# Altium PCB DEVEFX000001A.PcbDoc (part 3 of 3)
Units mm, origin at the board's own origin, x right, y up, seen from the top; angles counter-clockwise.
Board outline 90 x 103.5 mm, 6 copper layers (Top Layer, IN1, IN2, IN3, IN4, Bottom Layer), stack 1.072 mm thick; 156 components, 261 nets, 794 pads, 332 vias.
Unrouted connection lines stored in the file: 137.
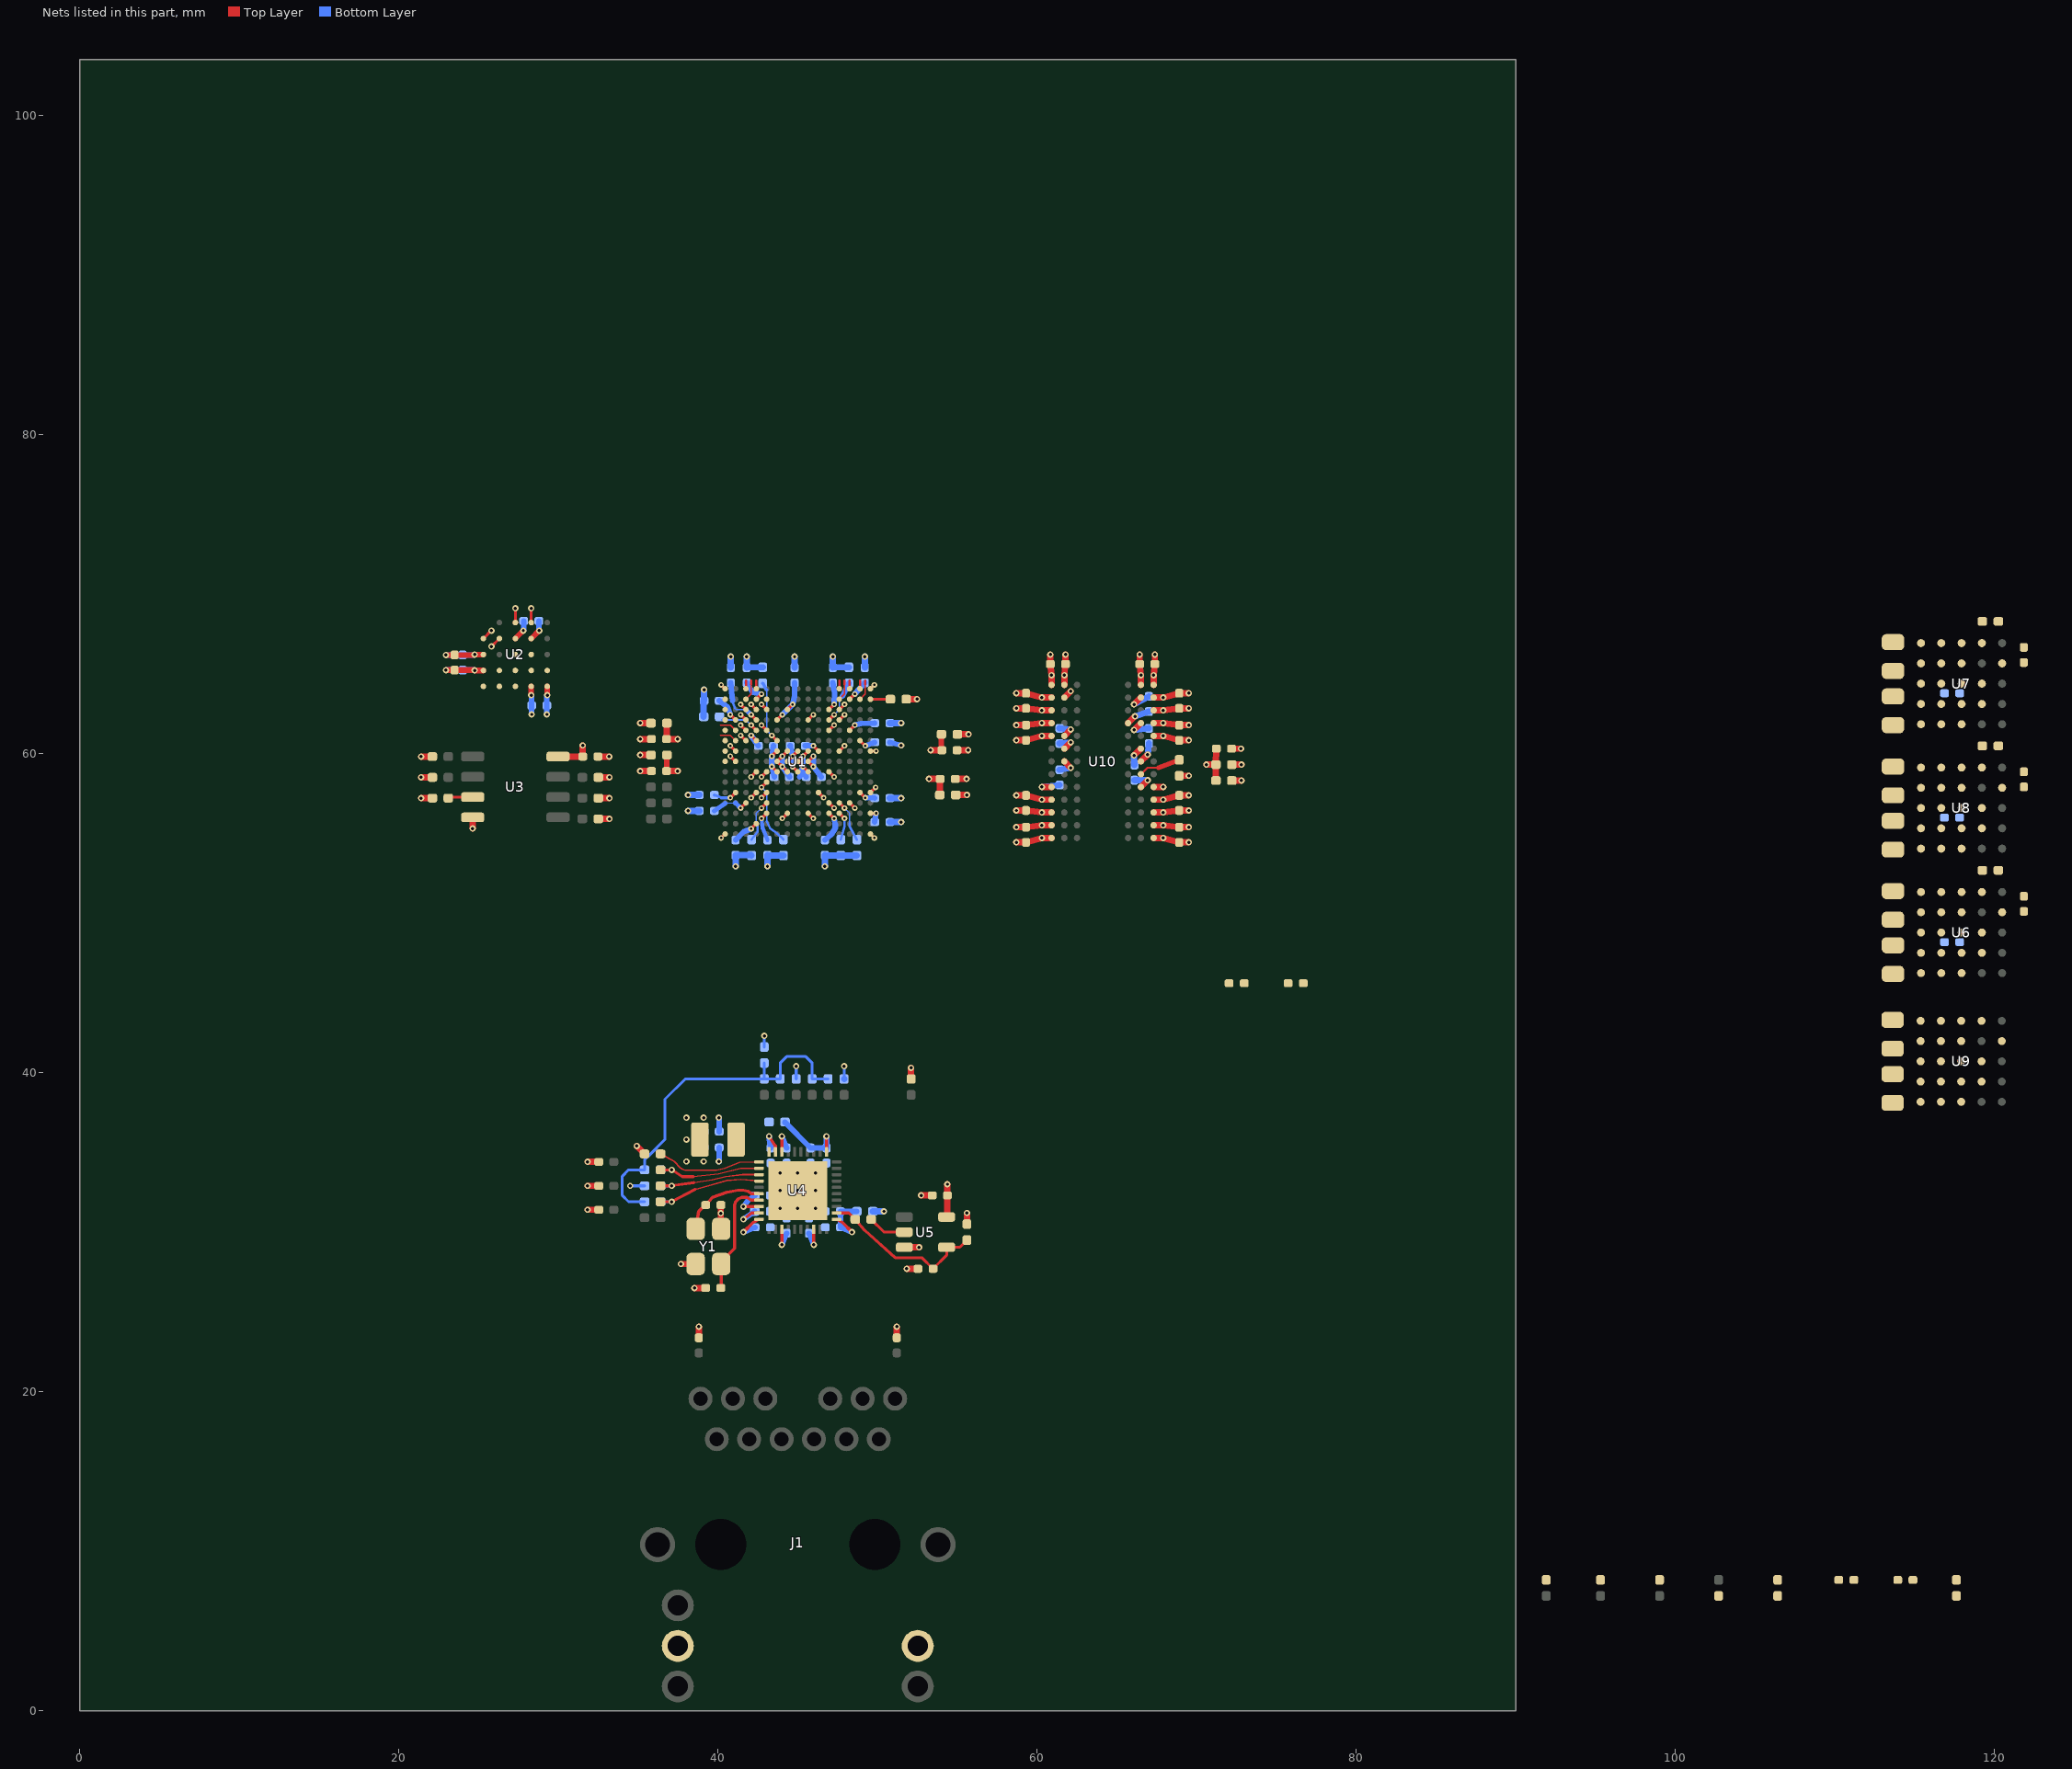
[diagram p7: the nets of this part, all layers, seen from the top]

## Via types
v1: diameter 0.4, hole 0.2, Top Layer to Bottom Layer, tented both sides, 159 vias
v2: diameter 0.35/0.15/0.35 (per signal layer), hole 0.15, Top Layer to Bottom Layer, tented both sides, 91 vias
v3: diameter 0.35, hole 0.15, Top Layer to Bottom Layer, tented both sides, 46 vias
v4: diameter 0.4/0.2/0.4 (per signal layer), hole 0.2, Top Layer to Bottom Layer, tented both sides, 27 vias
v5: diameter 0.5, hole 0.2, Top Layer to Bottom Layer, 9 vias

## Nets (pads, with @x,y where several pads share a name; then routed paths per layer and width w, separated by ;. In a path a pad name is that pad's centre, name@x,y a point inside that pad or via, vN(x,y) a via of type N, cw(c..) or ccw(c..) an arc to the next point about the centre after c; other vN are vias at no path point) (continued)
GND: C1.1 C2.1 C3.1 C4.1 C5.1 C6.1 C7.1 C8.1 C9.1 C10.1 C11.1 C12.1 C13.1 C14.1 C15.1 C16.1 C17.1 C18.1 C19.1 C20.1 C21.1 C22.1 C23.1 C24.1 C25.1 C26.1 C27.1 C28.1 C29.1 C30.1 C31.1 C32.1 C33.1 C34.1 C35.1 C36.1 C37.1 C38.1 C39.1 C40.1 C41.1 C42.1 C43.1 C44.1 C45.1 C46.1 C47.1 C48.1 C49.1 C50.1 C51.1 C52.1 C53.1 C54.1 C55.1 C56.1 C57.1 C58.1 C59.1 C60.1 C61.1 C62.1 C63.1 C64.1 C65.1 C66.1 C67.1 C68.1 C69.1 C70.1 C71.1 C72.1 C73.1 C74.1 C75.1 C76.1 C77.1 C78.1 C79.1 C80.1 C81.1 C82.1 C83.1 J1.13 R1.2 R2.2 R3.2 R4.2 R5.2 R6.2 R7.2 R8.2 R24.1 R29.1 R31.1 R38.2 R43.2 R44.2 R45.2 R46.2 R53.1 R?.2 U1.A1 U1.A15 U1.D3 U1.G6 U1.G8 U1.H7 U1.H9 U1.J6 U1.J8 U1.M13 U1.R1 U1.R15 U2.B3 U2.C1 U2.E5 U3.4 U4.41 U5.3 U6.B3 U6.B4 U6.C3 U6.D3 U6.D4 U6.E3 U7.B3 U7.B4 U7.C3 U7.D3 U7.D4 U7.E3 U8.B3 U8.B4 U8.C3 U8.D3 U8.D4 U8.E3 U9.B3 U9.B4 U9.C3 U9.D3 U9.D4 U9.E3 U10.A1 U10.A8 U10.B1 U10.B2 U10.B8 U10.C9 U10.D1 U10.D8 U10.D9 U10.F2 U10.F8 U10.J1 U10.J9 U10.L1 U10.L9 U10.N1 U10.N9 Y1.2 Y1.4 | length 85.4
  Top Layer w0.2: v2(40.2,54.7) U1.R1@40.45,54.95 ; v2(40.2,64.3) U1.A1@40.45,64.05 ; v2(41.425,62.425) U1.D3@41.75,62.1 ; v2(43.375,59.175) U1.J6@43.7,58.85 ; v2(43.375,59.825) U1.G6@43.7,60.15 ; U1.J8@45,58.85 v2(44.675,59.175) U1.H7@44.35,59.5 v2(44.675,59.825) U1.G8@45,60.15 ; v2(45.975,59.175) U1.H9@45.65,59.5 v2(45.975,59.825) ; U1.M13@48.25,56.9 v2(48.575,56.575) ; U1.R15@49.55,54.95 v2(49.8,54.7) ; U1.A15@49.55,64.05 v2(49.8,64.3)
  Top Layer w0.35: v1(22.946,66.175) C21.1@23.5,66.175 24.721,66.175 v1(24.746,66.2) U2.C1@25.3,66.2 ; U2.B3@27.3,67.2 v1(27.8,67.7) ; v1(29.3,63.646) U2.E5@29.3,64.2 ; C42.1@40.175,31.7 v1(40.175,31.175) 40.175,30.225 Y1.2@40.2,30.2
  Top Layer w0.4: v1(24.625,55.295) U3.4@24.625,55.995 ; v1(31.825,31.4) C26.1@32.525,31.4 ; v1(31.825,32.9) C27.1@32.525,32.9 ; v1(31.825,34.4) C28.1@32.525,34.4 ; C20.1@32.475,59.8 v1(33.175,59.8) ; v1(35.125,58.9) C48.1@35.825,58.9 ; v1(35.125,60.9) C46.1@35.825,60.9 ; v1(37.675,28) Y1.4@38.375,28 ; v1(38.525,26.5) C41.1@39.225,26.5 ; C29.1@38.8,23.375 v1(38.8,24.075) ; C25.1@51.2,23.375 v1(51.2,24.075) ; U5.3@51.675,29.05 v1(52.6,29.05) ; R5.2@51.8,63.4 v1(52.475,63.4) ; v1(51.825,27.7) C39.1@52.525,27.7 ; v1(52.725,32.3) C40.1@53.425,32.3 ; C49.1@54.875,58.4 v1(55.575,58.4) ; C47.1@54.975,60.2 v4(55.675,60.2) ; v1(58.7,54.425) C75.1@59.3,54.425 v1(60.3,54.7) U10.N1@60.9,54.7 ; v1(58.7,56.425) C76.1@59.3,56.425 v1(60.3,56.3) U10.L1@60.9,56.3 ; v4(58.7,61.775) C83.1@59.3,61.775 v4(60.3,61.9) U10.D1@60.9,61.9 ; v1(58.7,63.775) C81.1@59.3,63.775 v1(60.3,63.5) U10.B1@60.9,63.5 ; v1(60.3,57.9) U10.J1@60.9,57.9 ; v1(60.825,66.2) C67.1@60.825,65.6 v1(60.9,64.9) U10.A1@60.9,64.3 ; U10.F2@61.7,60.3 v4(62.1,60.7) ; U10.B2@61.7,63.5 v1(62.1,63.9) ; v4(66.076,59.876) U10.F8@66.5,60.3 ; v4(66.076,61.476) U10.D8@66.5,61.9 ; v1(66.076,63.076) U10.B8@66.5,63.5 ; v1(66.425,66.2) C68.1@66.425,65.6 v1(66.5,64.9) U10.A8@66.5,64.3 ; U10.N9@67.3,54.7 v1(67.9,54.7) C77.1@68.9,54.425 v1(69.5,54.425) ; U10.L9@67.3,56.3 v1(67.9,56.3) C78.1@68.9,56.425 v1(69.5,56.425) ; U10.J9@67.3,57.9 v4(67.9,57.9) ; U10.D9@67.3,61.9 v1(67.9,61.9) C80.1@68.9,61.775 v1(69.5,61.775) ; U10.C9@67.3,62.7 v1(67.9,62.7) C79.1@68.9,62.825 v1(69.5,62.825) ; R?.2@68.9,58.6 v4(69.5,58.6) ; C66.1@72.175,60.3 v1(72.775,60.3) ; R53.1@72.2,59.3 v1(72.8,59.3)
  Bottom Layer w0.177: v1(34.5,32.9) R31.1@35.4,32.9 ; R29.1@44.9,39.6 v1(44.9,40.4) ; R24.1@47.9,39.6 v1(47.9,40.4)
  Bottom Layer w0.35: v1(22.946,66.175) C24.1@24,66.175 24.721,66.175 v1(24.746,66.2) ; v1(27.8,67.7) 27.825,67.725 C23.1@27.825,68.3 ; v1(29.275,62.446) C22.1@29.275,63 29.275,63.621 v1(29.3,63.646) ; v1(40.05,34.425) 40.075,34.425 C45.1@40.075,35.3 ; v1(40.05,37.175) 40.075,37.175 C33.1@40.075,36.3 ; C5.1@43.475,60.475 v2(43.375,59.825) v2(43.375,59.175) C3.1@43.525,58.525 ; C1.1@44.525,60.475 v2(44.675,59.825) v2(44.675,59.175) ; v2(45.975,59.825) v2(45.975,59.175) C4.1@46.475,58.525 ; C10.1@50.775,60.7 v4(51.475,60.5)
  Bottom Layer w0.4: v1(38.125,56.4) C18.1@38.825,56.4 ; v1(38.125,57.4) C19.1@38.825,57.4 ; R2.2@39.1,62.3 39.1,63.275 C16.1@39.125,63.3 v1(39.125,64) ; C15.1@40.8,65.375 v1(40.8,66.075) ; v1(41.1,52.925) C2.1@41.1,53.625 42.075,53.625 R8.2@42.1,53.6 ; v1(41.8,66.075) C17.1@41.8,65.375 41.825,65.4 R3.2@42.8,65.4 ; v1(43.1,52.925) C6.1@43.1,53.625 43.125,53.6 R1.2@44.1,53.6 ; C14.1@44.8,65.375 v1(44.8,66.075) ; v1(46.7,52.925) C7.1@46.7,53.625 46.725,53.6 R7.2@47.7,53.6 R6.2@48.7,53.6 ; v1(47.2,66.075) C13.1@47.2,65.375 47.225,65.4 R4.2@48.2,65.4 ; C12.1@49.2,65.375 v1(49.2,66.075) ; C9.1@50.775,55.7 v1(51.475,55.7) ; C8.1@50.775,57.2 v1(51.475,57.2) ; C11.1@50.775,61.9 v1(51.475,61.9) ; v1(60.3,57.9) C70.1@61.4,58.025 ; C71.1@61.4,60.625 v4(62.1,60.7) ; v4(66.076,59.876) C82.1@66.1,59.275 ; v4(66.076,61.476) C69.1@67,61.575 ; v1(66.076,63.076) C72.1@67,63.575
  other v5: 43.9,31.5 45,31.5 46.1,31.5 43.9,32.6 45,32.6 46.1,32.6 43.9,33.7 45,33.7 46.1,33.7
HYPERRAM_CK_C: U1.G2 U2.B1 | length 1.2
  Top Layer w0.177: U2.B1@25.3,67.2 v1(25.8,67.7)
  Top Layer w0.2: v2(40.775,60.475) U1.G2@41.1,60.15
HYPERRAM_CK_T: U1.H2 U2.B2 | length 1.2
  Top Layer w0.177: v1(25.8,66.7) U2.B2@26.3,67.2
  Top Layer w0.2: v2(40.775,59.825) U1.H2@41.1,59.5
HYPERRAM_CS_N: U1.E3 U2.A3 | length 1.4
  Top Layer w0.177: U2.A3@27.3,68.2 v1(27.3,69.1)
  Top Layer w0.2: v2(41.425,61.775) U1.E3@41.75,61.45
HYPERRAM_DQ0: U1.D1 U2.D3
HYPERRAM_DQ1: U1.H1 U2.D2
HYPERRAM_DQ2: U1.C1 U2.C4
HYPERRAM_DQ3: U1.E1 U2.D4
HYPERRAM_DQ4: U1.E2 U2.D5 | length 1.1
  Top Layer w0.089: 40.15,61.775 40.775,61.775 U1.E2@41.1,61.45
HYPERRAM_DQ5: U1.F2 U2.E3 | length 1.1
  Top Layer w0.089: 40.15,61.125 40.775,61.125 U1.F2@41.1,60.8
HYPERRAM_DQ6: U1.F1 U2.E2
HYPERRAM_DQ7: U1.G1 U2.E1
HYPERRAM_RWDS: U1.B1 U2.C3
IRQ_ETH_INTB_N: R42.2 U4.31 | length 6.6
  Top Layer w0.1: R42.2@36.4,34.9 37.275,34.425 37.65,34.025 ccw(c38.012,34.387) 38.012,33.875 39.896,33.875 40.425,34 41.35,34.375 U4.31@42.575,34.4
P0V75_DDR3_VREF: C66.2 C82.2 C83.2 R52.1 R53.2 U1.G15 U1.L15 U10.E1 U10.J8 | length 7.1
  Top Layer w0.2: U1.L15@49.55,57.55 v3(49.875,57.875) ; U1.G15@49.55,60.15 v3(49.904,60.15)
  Top Layer w0.4: v1(58.7,60.825) C83.2@59.3,60.825 v1(60.3,61.1) U10.E1@60.9,61.1 ; U10.J8@66.5,57.9 v1(66.924,58.324) ; v1(70.6,59.3) R53.2@71.2,59.3 ; R52.1@71.2,58.3 R53.2@71.2,59.3 ; C66.2@71.225,60.3 R53.2@71.2,59.3
  Bottom Layer w0.4: C82.2@66.1,58.325 v1(66.924,58.324)
P0V95: C3.2 C4.2 C11.2 C18.2 C55.2 FB3.1 FB4.1 FB5.1 FB6.1 U1.E13 U1.G7 U1.G9 U1.H6 U1.H8 U1.J7 U1.J9 U1.M3 U7.C1 U7.D1 U7.D2 U7.E1 U7.E2 | length 14
  Top Layer w0.2: v2(41.425,56.575) U1.M3@41.75,56.9 ; U1.J7@44.35,58.85 v2(44.025,59.175) U1.H6@43.7,59.5 v2(44.025,59.825) U1.G7@44.35,60.15 ; U1.J9@45.65,58.85 v2(45.325,59.175) U1.H8@45,59.5 v2(45.325,59.825) U1.G9@45.65,60.15 ; U1.E13@48.25,61.45 v2(48.575,61.775)
  Top Layer w0.4: v1(35.125,59.9) FB4.1@35.8,59.9 ; v1(35.125,61.9) FB6.1@35.8,61.9 ; FB3.1@54.9,57.4 v1(55.6,57.4) ; FB5.1@55,61.2 v4(55.7,61.2)
  Bottom Layer w0.1: 40.45,56.875 41.1,56.9
  Bottom Layer w0.3: C18.2@39.775,56.4 40.45,56.875 ; 41.1,56.9 v2(41.425,56.575)
  Bottom Layer w0.35: v2(44.025,59.825) v2(44.025,59.175) C3.2@44.475,58.525 ; 45.125,58.525 45.16,58.637 v2(45.325,59.175) ; v2(45.325,59.825) v2(45.325,59.175) ; C4.2@45.525,58.525 v2(45.325,59.175) ; v2(48.575,61.775) 48.95,61.875 C11.2@49.825,61.9
P0V95_FPGA_VCCA_BL: C48.2 FB4.2 U1.L5 | length 2.2
  Top Layer w0.2: v2(42.725,57.225) U1.L5@43.05,57.55
  Top Layer w0.35: C48.2@36.775,58.9 36.8,58.925 FB4.2@36.8,59.9
  Top Layer w0.4: C48.2@36.775,58.9 v1(37.475,58.9)
P0V95_FPGA_VCCA_BR: C49.2 FB3.2 U1.L10 | length 2.2
  Top Layer w0.2: U1.L10@46.3,57.55 v2(46.625,57.225)
  Top Layer w0.4: v1(53.225,58.4) C49.2@53.925,58.4 53.9,58.375 FB3.2@53.9,57.4
P0V95_FPGA_VCCA_TL: C46.2 FB6.2 U1.E5 | length 2.2
  Top Layer w0.2: v2(42.725,61.775) U1.E5@43.05,61.45
  Top Layer w0.4: C46.2@36.8,60.875 C46.2@36.775,60.9 ; FB6.2@36.8,61.9 36.8,60.925 C46.2@36.775,60.9 ; v1(37.475,60.9) C46.2@36.775,60.9
P0V95_FPGA_VCCA_TR: C1.2 C47.2 FB5.2 U1.G10 | length 2.7
  Top Layer w0.2: v2(45.975,60.475) U1.G10@46.3,60.15
  Top Layer w0.35: FB5.2@54,61.2 54,60.225 C47.2@54.025,60.2
  Top Layer w0.4: v4(53.325,60.2) C47.2@54.025,60.2
  Bottom Layer w0.35: C1.2@45.475,60.475 v2(45.975,60.475)
P1V0_ETH_AVDD: C34.2 C38.2 FB2.2 U4.21 | length 5
  Top Layer w0.2: U4.21@46.8,35.025 v1(46.8,36)
  Bottom Layer w0.35: FB2.2@44.2,36.9 44.2,36.875 C34.2@45.8,35.275 C38.2@46.8,35.275 v1(46.8,36)
P1V0_ETH_DVDD: C33.2 C35.2 C36.2 C37.2 C45.2 FB2.1 L1.2 U4.3 U4.8 U4.38 | length 5.5
  Top Layer w0.2: v1(41.6,31.6) U4.38@42.575,31.6 ; v1(44,29.2) U4.3@44,30.175 ; v1(46,29.2) U4.8@46,30.175
  Bottom Layer w0.35: v1(41.6,31.6) 41.9,32 C35.2@42.325,32.3 ; v1(44,29.2) C36.2@44.3,29.925 ; C37.2@45.7,29.925 v1(46,29.2)
  other v1: 38.025,34.425 39.1,34.425 38.025,35.8 38.025,37.175 39.1,37.175
P1V2_1V8_FPGA_VCCIO2A: C14.2 U1.C7 U1.D6 | length 3.2
  Top Layer w0.2: U1.D6@43.7,62.1 v2(44.025,62.425) ; U1.C7@44.35,62.75 v2(44.675,63.075)
  Bottom Layer w0.35: v2(44.025,62.425) v2(44.675,63.075) 44.8,63.6 C14.2@44.8,64.425
P1V2_1V8_FPGA_VCCIO2B: C13.2 U1.C11 U1.D9 | length 2.3
  Top Layer w0.2: U1.D9@45.65,62.1 v2(45.975,62.425) ; U1.C11@46.95,62.75 v2(47.275,63.075)
  Bottom Layer w0.35: C13.2@47.2,64.425 47.3,63.8 v2(47.275,63.075)
P1V2_1V8_FPGA_VCCIO4B: C6.2 U1.N5 U1.N7 | length 2.3
  Top Layer w0.2: v2(42.725,55.925) U1.N5@43.05,56.25 ; v2(44.025,55.925) U1.N7@44.35,56.25
  Bottom Layer w0.25: v2(42.725,55.925) 42.8,55.3 C6.2@43.1,54.575
P1V5: C8.2 C10.2 C63.2 C67.2 C68.2 C69.2 C70.2 C71.2 C72.2 C73.2 C74.2 C75.2 C76.2 C77.2 C78.2 C79.2 C80.2 C81.2 R52.2 U1.F14 U1.G12 U1.J11 U1.L14 U9.C1 U9.D1 U9.D2 U9.E1 U9.E2 U10.A2 U10.A9 U10.B9 U10.C1 U10.D7 U10.E2 U10.E9 U10.G2 U10.G8 U10.K1 U10.K9 U10.M1 U10.M9 | length 28.4
  Top Layer w0.2: U1.J11@46.95,58.85 v2(47.275,58.525) ; U1.G12@47.6,60.15 v2(47.925,60.475) ; U1.L14@48.9,57.55 v2(49.225,57.225) ; U1.F14@48.9,60.8 v2(49.225,60.475)
  Top Layer w0.4: v1(58.7,55.375) C75.2@59.3,55.375 v1(60.3,55.5) U10.M1@60.9,55.5 ; v1(58.7,57.375) C76.2@59.3,57.375 v1(60.3,57.1) U10.K1@60.9,57.1 ; v1(58.7,62.825) C81.2@59.3,62.825 v1(60.3,62.7) U10.C1@60.9,62.7 ; U10.G2@61.7,59.5 v1(62.1,59.1) ; U10.E2@61.7,61.1 v4(62.1,61.5) ; U10.A2@61.7,64.3 v1(61.7,64.9) C67.2@61.775,65.6 v1(61.775,66.2) ; U10.D7@65.7,61.9 v1(66.124,62.324) ; U10.G8@66.5,59.5 v4(66.924,59.924) ; U10.M9@67.3,55.5 v1(67.9,55.5) C77.2@68.9,55.375 v1(69.5,55.375) ; U10.K9@67.3,57.1 v1(67.9,57.1) C78.2@68.9,57.375 v1(69.5,57.375) ; U10.E9@67.3,61.1 v4(67.9,61.1) C80.2@68.9,60.825 v4(69.5,60.825) ; U10.B9@67.3,63.5 v1(67.9,63.5) C79.2@68.9,63.775 v1(69.5,63.775) ; U10.A9@67.3,64.3 v1(67.3,64.9) C68.2@67.375,65.6 v1(67.375,66.2) ; R52.2@72.2,58.3 v1(72.8,58.3)
  Bottom Layer w0.35: v2(49.225,57.225) C8.2@49.825,57.2 ; v2(49.225,60.475) C10.2@49.825,60.7
  Bottom Layer w0.4: C70.2@61.4,58.975 v1(62.1,59.1) ; C71.2@61.4,61.575 v4(62.1,61.5) ; v1(66.124,62.324) C72.2@67,62.625 ; v4(66.924,59.924) C69.2@67,60.625
P1V8: C5.2 C7.2 C9.2 C15.2 C16.2 C19.2 C20.2 C21.2 C22.2 C23.2 C24.2 C40.2 C44.2 C51.2 R10.2 R12.1 R13.2 R14.2 R15.2 R16.2 R41.1 R42.1 U1.D2 U1.D4 U1.E11 U1.F4 U1.J4 U1.L2 U1.L4 U1.M11 U1.N9 U1.N11 U1.N15 U2.B4 U2.D1 U2.E4 U3.8 U4.28 U5.5 U6.C1 U6.D1 U6.D2 U6.E1 U6.E2 | length 31.8
  Top Layer w0.2: v2(40.775,57.225) U1.L2@41.1,57.55 ; v2(40.775,62.425) U1.D2@41.1,62.1 ; v2(42.075,57.225) U1.L4@42.4,57.55 ; v2(42.075,58.525) U1.J4@42.4,58.85 ; v2(42.075,61.125) U1.F4@42.4,60.8 ; v2(42.075,62.425) U1.D4@42.4,62.1 ; U4.28@44,35.025 v1(44,36) ; U1.N9@45.65,56.25 v2(45.975,55.925) ; U1.N11@46.95,56.25 v2(47.275,55.925) ; U1.M11@46.95,56.9 v2(47.275,56.575) ; U1.E11@46.95,61.45 v2(47.275,61.775) ; U1.N15@49.55,56.25 v2(49.904,56.25)
  Top Layer w0.35: v1(22.946,65.225) C21.2@23.5,65.225 24.721,65.225 v1(24.746,65.2) U2.D1@25.3,65.2 ; v1(28.3,63.646) U2.E4@28.3,64.2 ; U2.B4@28.3,67.2 v1(28.8,67.7)
  Top Layer w0.4: v1(21.4,57.2) R12.1@22.1,57.2 ; v1(21.4,58.5) R13.2@22.1,58.5 ; v1(21.4,59.8) R16.2@22.1,59.8 ; U3.8@29.975,59.805 29.98,59.8 C20.2@31.525,59.8 v1(31.525,60.5) ; R10.2@32.5,55.9 v1(33.2,55.9) ; R15.2@32.5,57.2 v1(33.2,57.2) ; R14.2@32.5,58.5 v1(33.2,58.5) ; v1(34.905,35.395) R42.1@35.4,34.9 ; R41.1@52.1,39.6 v1(52.1,40.3) ; U5.5@54.325,30.95 54.375,31 C40.2@54.375,32.3 v1(54.375,33)
  Bottom Layer w0.089: 41.075,62.825 41.15,62.75 41.75,62.75
  Bottom Layer w0.15: 40.9,63.3 41.075,62.825
  Bottom Layer w0.2: C19.2@39.775,57.4 40.2,57.225 v2(40.775,57.225)
  Bottom Layer w0.3: 41.75,62.75 v2(42.075,62.425)
  Bottom Layer w0.35: v1(22.946,65.225) C24.2@24,65.225 24.721,65.225 v1(24.746,65.2) ; v1(28.3,63.646) 28.325,63.621 C22.2@28.325,63 v1(28.325,62.446) ; C23.2@28.775,68.3 28.775,67.725 v1(28.8,67.7) ; C16.2@40.075,63.3 40.6,62.9 v2(40.775,62.425) ; C15.2@40.8,64.425 40.9,63.3 ; v2(42.075,61.125) C5.2@42.525,60.475 ; v1(44,36) C44.2@44.3,35.275 ; C7.2@46.7,54.575 47.125,54.95 47.35,55.325 47.35,55.55 v2(47.275,55.925) ; C9.2@49.825,55.7 v2(49.904,56.25)
P1V8_3V3_FPGA_VCCIO_BL: C2.2 U1.P4 | length 1.7
  Top Layer w0.2: v2(42.075,55.275) U1.P4@42.4,55.6
  Bottom Layer w0.35: C2.2@41.1,54.575 41.625,55.1 v2(42.075,55.275)
P1V8_3V3_FPGA_VCCIO_TL: C17.2 U1.B4 | length 1.7
  Top Layer w0.2: U1.B4@42.4,63.4 v2(42.725,63.725)
  Bottom Layer w0.35: C17.2@41.8,64.425 42.175,63.825 v2(42.725,63.725)
P1V8_3V3_FPGA_VCCIO_TR: C12.2 U1.B13 | length 1.4
  Top Layer w0.2: U1.B13@48.25,63.4 v2(48.575,63.725)
  Bottom Layer w0.35: v2(48.575,63.725) C12.2@49.2,64.425
P3V3: C43.2 C59.2 FB1.1 J1.16 R34.2 R40.2 U4.29 U8.C1 U8.D1 U8.D2 U8.E1 U8.E2 | length 3.9
  Top Layer w0.2: v1(43.2,36) 43.6,35.4 U4.29@43.6,35.025
  Top Layer w0.4: R40.2@55.6,30.5 v1(55.6,31.2)
  Bottom Layer w0.177: R34.2@42.9,41.6 v1(42.9,42.3)
  Bottom Layer w0.35: v1(43.2,36) C43.2@43.3,35.275
  Bottom Layer w0.4: FB1.1@49.7,31.3 v1(50.4,31.3)
P3V3_ETH_AVDD: C30.2 C31.2 C32.2 FB1.2 U4.11 U4.40 | length 6.1
  Top Layer w0.2: v1(41.6,30) 42.2,30.6 U4.40@42.575,30.8 ; U4.11@47.425,30.8 47.8,30.6 v1(48.4,30)
  Bottom Layer w0.35: v1(41.6,30) C31.2@42.325,30.3 ; v1(48.4,30) C32.2@47.675,30.3 C30.2@47.675,31.3 FB1.2@48.7,31.3
P3V3_ETH_STRAP_VPU: R25.1 R26.1 R27.1 R28.1 R30.1 R32.1 R34.1 | length 23.4
  Bottom Layer w0.177: R32.1@35.4,31.9 34.4,31.9 34,32.3 34,33.5 34.4,33.9 R30.1@35.4,33.9 35.4,34.525 35.7,34.825 36.675,35.8 36.675,38.325 37.95,39.6 R25.1@42.9,39.6 ; R34.1@42.9,40.6 R25.1@42.9,39.6 ; R27.1@46.9,39.6 R28.1@45.9,39.6 45.9,40.6 45.5,41 44.3,41 43.9,40.6 R26.1@43.9,39.6 R25.1@42.9,39.6
P5V: C50.2 C54.2 C58.2 C62.2 R47.2 U6.C5 U6.D5 U6.E5 U7.C5 U7.D5 U7.E5 U8.C5 U8.D5 U8.E5 U9.C5 U9.D5 U9.E5
PD_DDR3_ZQ: R?.1 U10.H8 | length 2.7
  Top Layer w0.118: U10.H8@66.5,58.7 66.9,59.1 67.6,59.1
  Top Layer w0.3: 67.6,59.1 R?.1@68.9,59.6
PD_ETH_CFG_LDO0: R31.2 R36.1 U4.33 | length 6.9
  Top Layer w0.1: 38.5,33.1 39.65,33.275 40.475,33.475 41.55,33.6 U4.33@42.575,33.6
  Top Layer w0.177: R36.1@36.4,32.9 v1(37.1,32.9) 38.5,33.1
  Bottom Layer w0.177: R31.2@36.4,32.9 v1(37.1,32.9)
PD_ETH_RSET: R38.1 U4.39 | length 2
  Top Layer w0.2: v1(41.6,30.8) 42.1,31.2 U4.39@42.575,31.2
  Bottom Layer w0.35: v1(41.6,30.8) R38.1@42.3,31.3
PD_FGPA_REF_RES_1A: R1.1 U1.K5 | length 4.3
  Top Layer w0.2: v2(42.725,57.875) U1.K5@43.05,58.2
  Bottom Layer w0.089: v2(42.725,57.875) 43.05,57.55 43.05,55.75
  Bottom Layer w0.15: 43.05,55.75 43.275,55.3 43.7,54.975 R1.1@44.1,54.6
PD_FGPA_REF_RES_1B: R2.1 U1.E4 | length 2.4
  Top Layer w0.2: v2(42.075,61.775) U1.E4@42.4,61.45
  Bottom Layer w0.089: 40.475,62.1 41.75,62.1 v2(42.075,61.775)
  Bottom Layer w0.15: R2.1@40.275,62.1 40.475,62.1
PD_FGPA_REF_RES_2A: R3.1 U1.F6 | length 3.9
  Top Layer w0.2: v2(43.375,61.125) U1.F6@43.7,60.8
  Bottom Layer w0.089: 43.05,63.975 43.05,61.45 v2(43.375,61.125)
  Bottom Layer w0.2: R3.1@42.8,64.4 43.05,63.975
PD_FGPA_REF_RES_2B: R4.1 U1.D11 | length 2.7
  Top Layer w0.2: U1.D11@46.95,62.1 v2(47.275,62.425)
  Bottom Layer w0.089: v2(47.275,62.425) 47.6,62.75 47.6,63.4 47.8,63.6
  Bottom Layer w0.35: 47.8,63.6 R4.1@48.2,64.4
PD_FGPA_REF_RES_3A: R5.1 U1.B15 | length 1.3
  Top Layer w0.15: U1.B15@49.55,63.4 R5.1@50.8,63.4
PD_FGPA_REF_RES_3B: R6.1 U1.M12 | length 2.7
  Top Layer w0.2: U1.M12@47.6,56.9 v2(47.925,56.575)
  Bottom Layer w0.089: v2(47.925,56.575) 48.25,56.25 48.25,55.625
  Bottom Layer w0.15: 48.25,55.625 48.25,55.425 R6.1@48.7,54.6
PD_FGPA_REF_RES_4A: R7.1 U1.N12 | length 1.8
  Top Layer w0.2: U1.N12@47.6,56.25 v2(47.925,55.925)
  Bottom Layer w0.15: R7.1@47.7,54.6 47.925,55.425 v2(47.925,55.925)
PD_FGPA_REF_RES_4B: R8.1 U1.M5 | length 2.7
  Top Layer w0.2: v2(42.725,56.575) U1.M5@43.05,56.9
  Bottom Layer w0.089: 42.4,55.625 42.4,56.25 v2(42.725,56.575)
  Bottom Layer w0.15: R8.1@42.1,54.6 42.475,55.075 42.475,55.425 42.4,55.625
PU_CFG_FLASH_WP_N: R12.2 U3.3 | length 1.6
  Top Layer w0.177: R12.2@23.1,57.2 23.165,57.265 U3.3@24.625,57.265
PU_ETH_CFG_EXT: R30.2 R35.1 U4.32 | length 7.1
  Top Layer w0.1: 38.45,33.475 40.025,33.65 41.425,34 U4.32@42.575,34
  Top Layer w0.177: R35.1@36.4,33.9 v1(37.1,33.9) 37.775,33.475 38.45,33.475
  Bottom Layer w0.177: R30.2@36.4,33.9 v1(37.1,33.9)
PU_ETH_CFG_LDO1: R32.2 R37.1 U4.34 | length 7.1
  Top Layer w0.1: 38.575,32.675 40.55,33.225 41.45,33.3 U4.34@42.575,33.2
  Top Layer w0.177: R37.1@36.4,31.9 v1(37.1,31.9) 38.575,32.675
  Bottom Layer w0.177: R32.2@36.4,31.9 v1(37.1,31.9)
PWRGD_P0V95: R48.1 R49.1 R50.1 R51.1 U7.C2
PWRGD_P1V5: U9.C2
PWRGD_P1V8: U6.C2
PWRGD_P3V3: U8.C2
RST_ETH_PHYRSTB_N: R33.1 U5.2 | length 2.4
  Top Layer w0.177: R33.1@49.6,30.8 50.4,30 U5.2@51.675,30
RST_ETH_PHYRSTB_R_N: C39.2 R33.2 R40.1 U4.12 U5.4 | length 10.6
  Top Layer w0.177: U4.12@47.425,31.2 48.2,31.2 R33.2@48.6,30.8 49.2,30.1 51.1,28.4 52.775,28.4 C39.2@53.475,27.7 54.325,28.55 U5.4@54.325,29.05 55.15,29.05 R40.1@55.6,29.5
RST_FPGA_CRESET_N: U1.J5 | length 0.5
  Top Layer w0.2: v3(42.725,58.525) U1.J5@43.05,58.85
RST_HYPERRAM_RST_N: U1.F3 U2.A4 | length 1.4
  Top Layer w0.177: U2.A4@28.3,68.2 v1(28.3,69.1)
  Top Layer w0.2: v2(41.425,61.125) U1.F3@41.75,60.8
TL_GPIO_03: U1.A3 | length 0.5
  Top Layer w0.15: U1.A3@41.75,64.05 41.75,64.55
TL_GPIO_04: U1.B3 | length 1.3
  Top Layer w0.089: U1.B3@41.75,63.4 42.075,63.725 42.075,64.35
  Top Layer w0.15: 42.075,64.35 42.075,64.55
TL_GPIO_06: U1.C3 | length 0.5
  Top Layer w0.2: v3(41.425,63.075) U1.C3@41.75,62.75
TL_GPIO_07: U1.C4 | length 0.5
  Top Layer w0.2: v3(42.075,63.075) U1.C4@42.4,62.75
TL_GPIO_09: U1.A4 | length 0.5
  Top Layer w0.15: U1.A4@42.4,64.05 42.4,64.55
TL_GPIO_10: U1.B5
TL_GPIO_11: U1.C5 | length 0.5
  Top Layer w0.2: v3(42.725,63.075) U1.C5@43.05,62.75
TR_GPIOR_12: U1.A13 | length 0.5
  Top Layer w0.15: U1.A13@48.25,64.05 48.25,64.55
TR_GPIOR_13: U1.A12 | length 0.5
  Top Layer w0.15: U1.A12@47.6,64.05 47.6,64.55
TR_GPIOR_15: U1.B12 | length 1.3
  Top Layer w0.089: U1.B12@47.6,63.4 47.925,63.725 47.925,64.35
  Top Layer w0.15: 47.925,64.35 47.925,64.55
TR_GPIOR_16: U1.C12 | length 0.5
  Top Layer w0.2: U1.C12@47.6,62.75 v3(47.925,63.075)
TR_GPIOR_18: U1.B14 | length 1.3
  Top Layer w0.089: U1.B14@48.9,63.4 49.225,63.725 49.225,64.35
  Top Layer w0.15: 49.225,64.35 49.225,64.55
TR_GPIOR_19: U1.A14 | length 0.5
  Top Layer w0.15: U1.A14@48.9,64.05 48.9,64.55
TR_GPIOR_20: U1.D12 | length 0.5
  Top Layer w0.2: U1.D12@47.6,62.1 v3(47.925,62.425)
VR_ETH_REG_OUT: L1.1 U4.30
VR_P0V95_FB: R44.1 U7.B1
VR_P0V95_INTVCC: C57.2 R48.2 U7.C4 U7.E4
VR_P0V95_TRACK_SS: C56.2 U7.A2
VR_P1V5_FB: R46.1 U9.B1
VR_P1V5_INTVCC: C65.2 U9.C4 U9.E4
VR_P1V5_TRACK_SS: C64.2 U9.A2
VR_P1V8_FB: R43.1 U6.B1
VR_P1V8_INTVCC: C53.2 U6.C4 U6.E4
VR_P1V8_TRACK_SS: C52.2 U6.A2
VR_P3V3_FB: R45.1 U8.B1
VR_P3V3_INTVCC: C61.2 U8.C4 U8.E4
VR_P3V3_TRACK_SS: C60.2 U8.A2
XTAL_ETH_XTAL_IN: C42.2 U4.36 Y1.3 | length 5.4
  Top Layer w0.2: Y1.3@38.6,30.2 38.8,31.3 C42.2@39.225,31.7 39.65,32.175 40.55,32.5 41.25,32.625 41.6,32.625 41.9,32.55 42.1,32.4 U4.36@42.575,32.4
XTAL_ETH_XTAL_OUT: C41.2 U4.37 Y1.1 | length 7.4
  Top Layer w0.2: C41.2@40.175,26.5 40.2,26.525 Y1.1@40.2,28 40.2,28.125 41.05,28.975 41.05,31.725 41.1,31.9 41.25,32.075 41.5,32.175 41.825,32.175 42.1,32 U4.37@42.575,32
pads on no net: J1.0 U1.D7 U1.E7 U1.E9 U1.F9 U1.H13 U1.P12 U2.A2 U2.A5 U2.B5 U2.C2 U2.C5 U5.1 U6.A1 U6.A4 U6.A5 U6.B2 U6.B5 U7.A1 U7.A4 U7.A5 U7.B2 U7.B5 U8.A1 U8.A4 U8.A5 U8.B2 U8.B5 U9.A1 U9.A4 U9.A5 U9.B2 U9.B5 U10.A3 U10.A7 U10.F1 U10.F9 U10.H1 U10.H9 U10.J7 U10.N2
copper on no net: | length 0.5
  Top Layer w0.177: v1(61.346,54.346) 61.7,54.7

## Polygon pours and split planes (outlines as drawn)
P0V75_DDR3_VREF on IN2 "P0V75_DDR3_VREF_L03_P000" (solid, remove dead copper, pour order 0): 49.6,60.5 49.5,60.3 49.475,60.075 49.575,59.875 49.905,59.728 50.875,59.55 51.163,59.538 51.45,59.525 51.875,59.55 52.45,59.75 56.625,59.85 63,60.3 66.075,57.825 70.85,57.825 71.65,58.625 71.65,60.225 71.05,60.825 68.175,60.825 67.524,61.476 66.076,61.476 63.95,61.325 62.875,61.525 62.35,61.875 60.975,62.325 58.7,62.275 51.7,61.5 50.65,61.5
GND on IN1 (split plane): 89.598,0.402 0.402,0.402 0.402,103.098 89.598,103.098
P0V75_DDR3_VREF on IN1 (split plane): 50.223,60.308 50.223,57.692 50.108,57.577 49.667,57.577 49.327,57.917 49.327,58.525 49.327,60.373 50.158,60.373
P1V8_3V3_FPGA_VCCIO_BL on IN3 (split plane): 42.41,55.475 42.41,52.565 41.49,52.565 41.49,55.86 42.41,55.86
P0V95 on IN3 (split plane): 48.998,62.06 48.998,62.05 49.006,62.011 49.028,61.978 49.035,61.973 49.035,61.551 48.369,60.836 47.996,60.79 45.975,60.79 45.914,60.784 45.854,60.766 45.8,60.737 45.752,60.698 45.713,60.65 45.684,60.596 45.666,60.536 45.66,60.475 45.663,60.463 45.66,60.45 45.66,60.225 45.661,60.22 45.661,60.214 45.664,60.207 45.665,60.2 45.668,60.196 45.67,60.191 45.91,59.806 45.91,57.225 45.91,56.602 45.679,56.371 45.665,56.35 45.66,56.325 45.66,55.925 45.66,52.602 44.34,52.602 44.34,55.925 44.334,55.986 44.316,56.046 44.287,56.1 44.248,56.148 44.2,56.187 44.146,56.216 44.086,56.234 44.025,56.24 42.725,56.24 42.664,56.234 42.604,56.216 42.55,56.187 42.502,56.148 42.463,56.1 42.434,56.046 42.417,55.99 41.458,55.99 41.165,56.396 41.165,56.738 41.396,56.91 41.825,56.91 41.826,56.91 42.976,56.935 42.98,56.936 42.983,56.936 42.992,56.939 43.001,56.941 43.004,56.943 43.007,56.944 43.407,57.169 43.413,57.174 43.421,57.179 43.423,57.182 43.426,57.185 43.43,57.193 43.435,57.2 43.436,57.204 43.437,57.208 43.438,57.216 43.44,57.225 43.44,59.825 43.44,61.46 47.35,61.46 47.351,61.46 47.363,61.463 47.375,61.465 47.375,61.466 47.376,61.466 47.951,61.716 47.961,61.723 47.971,61.729 47.971,61.73 47.972,61.73 47.978,61.74 47.985,61.75 47.985,61.751 47.987,61.763 47.99,61.775 47.99,62.36 48.698,62.36
P1V8 on IN3 (split plane): 89.598,0.402 0.402,0.402 0.402,103.098 89.598,103.098
P1V8_3V3_FPGA_VCCIO_TL on IN3 (split plane): 43.31,63.465 42.05,63.465 42.049,63.465 42.002,63.471 41.957,63.489 41.919,63.519 41.889,63.557 41.871,63.602 41.865,63.649 41.865,63.65 41.865,66.485 43.31,66.485
P0V95_FPGA_VCCA_BL on IN3 (split plane): 43.31,57.263 42.957,57.064 42.465,57.054 42.465,57.523 42.771,57.829 42.785,57.85 42.79,57.875 42.79,59.175 42.785,59.2 42.771,59.221 42.75,59.235 42.725,59.24 41.502,59.24 41.497,59.247 41.464,59.269 41.425,59.277 41.386,59.269 41.353,59.247 40.608,58.502 36.902,58.502 36.902,58.9 36.902,59.76 43.31,59.76
P0V95_FPGA_VCCA_TL on IN3 (split plane): 42.575,62.035 43.31,62.035 43.31,61.525 43.31,59.89 36.902,59.89 36.902,61.298 41.108,61.298 41.353,61.053 41.386,61.031 41.425,61.023 41.434,61.025 41.629,60.829 41.65,60.815 41.675,60.81 42.075,60.81 42.136,60.816 42.196,60.834 42.25,60.863 42.298,60.902 42.337,60.95 42.366,61.004 42.384,61.064 42.39,61.125 42.39,61.85 42.39,61.851 42.396,61.898 42.414,61.943 42.444,61.981 42.482,62.011 42.527,62.029 42.574,62.035
P1V8_3V3_FPGA_VCCIO_BL on IN3 (split plane): 44.073,56.104 44.118,56.086 44.156,56.056 44.186,56.018 44.204,55.973 44.21,55.926 44.21,55.925 44.21,52.577 44.203,52.572 44.198,52.565 42.54,52.565 42.54,55.475 42.54,55.925 42.54,55.926 42.546,55.973 42.564,56.018 42.594,56.056 42.632,56.086 42.677,56.104 42.724,56.11 42.725,56.11 44.025,56.11 44.026,56.11
P0V95_FPGA_VCCA_BR on IN3 (split plane): 47.879,59.129 47.9,59.115 47.925,59.11 48.575,59.11 54.298,59.135 54.298,57.789 52.292,57.789 51.485,58.597 51.452,58.619 51.413,58.627 49.225,58.627 49.186,58.619 49.153,58.597 49.148,58.59 47.942,58.59 47.506,58.832 47.503,58.833 47.5,58.835 47.491,58.837 47.482,58.839 47.479,58.839 47.475,58.84 47.275,58.84 47.214,58.834 47.154,58.816 47.1,58.787 47.052,58.748 47.013,58.7 46.984,58.646 46.966,58.586 46.96,58.525 46.96,57.625 46.961,57.62 46.961,57.614 46.964,57.607 46.965,57.6 46.968,57.596 46.97,57.591 47.179,57.256 47.173,57.225 47.175,57.216 46.598,56.64 46.04,56.64 46.04,57.225 46.04,59.76 47.248,59.76
P1V5 on IN3 (split plane): 74.948,53.802 58.589,53.802 51.526,55.792 51.018,56.251 51.005,56.259 50.992,56.268 50.442,56.518 50.437,56.519 50.432,56.522 49.907,56.697 49.89,56.699 49.873,56.702 48.574,56.677 47.967,56.677 47.347,57.297 47.314,57.319 47.289,57.324 47.09,57.644 47.09,58.525 47.09,58.526 47.096,58.573 47.114,58.618 47.144,58.656 47.182,58.686 47.227,58.704 47.274,58.71 47.275,58.71 47.458,58.71 47.894,58.468 47.897,58.467 47.9,58.465 47.909,58.463 47.918,58.461 47.921,58.461 47.925,58.46 49.148,58.46 49.153,58.453 49.186,58.431 49.225,58.423 51.37,58.423 52.178,57.615 52.211,57.593 52.25,57.586 54.4,57.586 54.439,57.593 54.472,57.615 54.494,57.648 54.502,57.688 54.502,59.175 54.502,60.675 54.494,60.714 54.472,60.747 54.439,60.769 54.4,60.777 52.675,60.777 52.636,60.769 52.603,60.747 51.783,59.927 48.575,59.927 48.536,59.919 48.535,59.919 47.933,60.231 47.74,60.36 47.74,60.66 48,60.66 48.004,60.661 48.008,60.661 48.408,60.711 48.417,60.714 48.427,60.716 48.429,60.718 48.432,60.719 48.439,60.725 48.447,60.731 49.147,61.481 49.153,61.491 49.16,61.5 49.16,61.501 49.161,61.502 49.162,61.514 49.165,61.525 49.165,61.973 49.172,61.978 49.194,62.011 49.202,62.05 49.202,63.558 53.067,67.423 74.948,67.423
P1V2_1V8_FPGA_VCCIO2B on IN3 (split plane): 47.86,62.49 46.35,62.49 46.325,62.485 46.304,62.471 46.073,62.24 45.975,62.24 45.974,62.24 45.927,62.246 45.882,62.264 45.844,62.294 45.814,62.332 45.796,62.377 45.79,62.424 45.79,62.425 45.79,66.485 47.86,66.485
P1V2_1V8_FPGA_VCCIO2A on IN3 (split plane): 44.86,62.125 44.86,61.59 43.44,61.59 43.44,66.485 44.86,66.485
P0V95_FPGA_VCCA_TR on IN3 (split plane): 45.975,60.66 47.61,60.66 47.61,60.325 47.612,60.319 47.612,60.312 47.614,60.306 47.615,60.3 47.619,60.295 47.621,60.289 47.626,60.284 47.629,60.279 47.635,60.276 47.639,60.271 47.864,60.121 47.867,60.12 47.87,60.118 48.477,59.803 48.481,59.786 48.503,59.753 48.536,59.731 48.575,59.723 51.825,59.723 51.864,59.731 51.897,59.753 52.717,60.573 54.298,60.573 54.298,59.264 48.575,59.24 47.952,59.24 47.321,59.871 47.3,59.885 47.275,59.89 46.011,59.89 45.79,60.244 45.79,60.45 45.787,60.463 45.79,60.475 45.789,60.475 45.796,60.523 45.814,60.568 45.844,60.606 45.882,60.636 45.927,60.654 45.974,60.66
P1V8_3V3_FPGA_VCCIO_TR on IN3 (split plane): 49.028,63.672 49.006,63.639 48.998,63.6 48.998,62.244 48.771,62.471 48.75,62.485 48.725,62.49 47.99,62.49 47.99,66.485 51.841,66.485
GND on IN4 (split plane): 89.598,0.402 0.402,0.402 0.402,103.098 89.598,103.098

## Other copper
Top Layer:
  region net P1V0_ETH_DVDD: 39.4,37.475 38.025,37.475 ccw(c38.025,37.175) 37.725,37.175 37.725,34.425 ccw(c38.025,34.425) 38.025,34.125 39.4,34.125
  region: 39.4,37.325
  region net VR_ETH_REG_OUT: 43.3,35.225 43.2,35.325 42.95,35.325 41.675,36.875 40.575,36.875 40.575,34.725 43.2,34.725 43.3,34.825
IN2:
  region: 53.05,60.5
Bottom Layer:
  region net P1V0_ETH_DVDD: 42.05,32.05 41.9,31.9 41.9,31.6 cw(c41.6,31.6) 41.6,31.3 40.725,31.3 40.475,31.55 39.925,31.55 39.75,31.375 39.75,30.925 41.275,29.4 43.325,29.4 44.125,30.2 45.825,30.2 46.3,29.725 46.3,28.325 45.825,27.85 39.625,27.85 37.725,29.75 37.725,34.425 37.725,37.175 37.725,37.975 38.4,38.65 41.775,38.65 42.375,38.05 42.375,37.6 42.8,37.175 43.375,37.175 43.5,37.05 43.5,36.775 43.35,36.625 42.05,36.625 41.85,36.825 40.85,36.825 40.7,36.975 40.7,37.475 40.4,37.775 39.7,37.775 39.4,37.475 39.4,34.1 40.95,32.55 42.45,32.55 42.6,32.4 42.6,32.2 42.45,32.05
  region net GND: 47.05,31.925 47,31.875 47,30.275 46.775,30.05 46.325,30.05 46.225,30.15 46.225,30.425 46.05,30.6 43.875,30.6 43.75,30.475 43.75,30.2 43.6,30.05 43.25,30.05 43,30.3 43,32.6 42.725,32.875 41.15,32.875 39.8,34.225 39.8,36.4 39.95,36.55 41.675,36.55 42.75,35.475 42.75,34.875 43.025,34.6 46.825,34.6 47.05,34.375
  region net P0V95: 44.35,58.275 45.175,58.275 45.675,58.275 45.675,58.775 44.35,58.775
IN1 (plane layer: these items are gaps in the copper):
  lines w0.2: 49.225,57.875 49.625,57.475 50.15,57.475 50.325,57.65 50.325,60.35 50.2,60.475 49.225,60.475 49.225,58.525 49.225,57.875
IN3 (plane layer: these items are gaps in the copper):
  lines w0.127: 36.8,59.825 43.375,59.825 ; 41.425,59.175 42.725,59.175 42.725,57.875 42.4,57.55 42.4,57 ; 41.425,61.125 41.675,60.875 42.075,60.875 ccw(c42.075,61.125) 42.325,61.125 42.325,61.85 cw(c42.575,61.85) 42.575,62.1 43.375,62.1 ; 42.475,52.5 42.475,55.475 42.475,55.925 ; 43.375,61.525 44.475,61.525 47.35,61.525 47.925,61.775 47.925,62.36 ; 43.375,63.4 42.05,63.4 cw(c42.05,63.65) 41.8,63.65 41.8,66.55 43.375,66.55 ; 44.925,61.525 44.925,62.125 44.925,66.55 43.375,66.55 ; 45.725,52.5 45.725,55.925 45.725,56.325 45.975,56.575 ; 45.725,60.45 45.725,60.225 45.975,59.825 ; 45.725,60.475 cw(c45.975,60.475) 45.975,60.725 48,60.725 48.4,60.775 49.1,61.525 49.1,62.05 48.725,62.425 47.925,62.425 ; 47.675,60.725 47.675,60.325 47.9,60.175 48.575,59.825 ; 49.225,58.525 47.925,58.525 47.475,58.775 47.275,58.775 ccw(c47.275,58.525) 47.025,58.525 47.025,57.625 47.275,57.225 46.625,56.575 45.975,56.575 ; 52.05,66.55 47.925,66.55 ; 54.4,59.2 48.575,59.175 47.925,59.175 47.275,59.825 45.975,59.825 ; 41.425,55.925 41.425,52.5 44.275,52.5 44.275,55.925 ccw(c44.025,55.925) 44.025,56.175 42.725,56.175 ccw(c42.725,55.925) 42.475,55.925 ; 41.425,55.925 42.075,55.925 42.475,55.925 ; 41.425,55.925 41.1,56.375 41.1,56.771 41.375,56.975 41.825,56.975 42.975,57 43.375,57.225 43.375,59.825 ; 43.375,59.825 43.375,66.55 ; 45.975,56.575 45.975,57.225 45.975,59.825 ; 47.925,62.425 46.625,62.425 46.35,62.425 46.1,62.175 45.975,62.175 cw(c45.975,62.425) 45.725,62.425 45.725,66.55 47.925,66.55 ; 47.925,62.425 47.925,66.55
  lines w0.2: 41.425,59.175 40.65,58.4 38.2,58.4 36.8,58.4 36.8,58.9 36.8,59.825 36.8,61.4 41.15,61.4 41.425,61.125 ; 44.275,52.5 45.725,52.5 ; 47.275,57.225 47.925,56.575 48.575,56.575 49.875,56.6 50.4,56.425 50.95,56.175 51.475,55.7 58.575,53.7 75.05,53.7 75.05,67.525 53.025,67.525 49.1,63.6 49.1,62.05 ; 48.575,59.825 51.825,59.825 52.675,60.675 54.4,60.675 54.4,59.175 54.4,57.688 52.25,57.688 51.413,58.525 49.225,58.525